# EAGLE board amyboardr4 (EAGLE 9.6.2)

Size 106.1 x 47.49 mm. Coordinates in mm from the lower left corner, seen from the top.
Outline: 0,0 106.1,0 106.1,47.49 0.25,47.49 0,0
Copper layers (1*16): Top 0.035mm / dielectric 1.5mm / Bottom 0.035mm
Design rules "default *": minimum track width 6mil, minimum drill 0.35mm, track to track 6mil, track to pad 6mil, pad to pad 6mil, via to via 6mil, smd to smd 6mil, copper to edge 10mil, drill to drill 6mil, minimum pad ring 10mil, minimum via ring 8mil, stop-mask expansion 4mil, vias tented up to drill 0mil, thermal gap 10mil
Net classes: 0 default: width 0.203 mm

## Footprints (pad centres in the part's own frame; a part is rotated, then mirrored left to right if it is on the bottom)
SW_218-4LPSTR = smd 1.27 x 0.76: 1 -3.81,1.905; 2 -3.81,0.635; 3 -3.81,-0.635; 4 -3.81,-1.905; 5 3.81,-1.905; 6 3.81,-0.635; 7 3.81,0.635; 8 3.81,1.905
2*4*3.5MM = smd 1.15 x 1.3: 1 -1.675,0; 2 1.675,0 | smd 0.9 x 1.2: 3 2.3,1.55; 4 -2.3,1.55
C0603 = smd 0.889 x 0.889: 1 0,0.762; 2 0,-0.762
PANASONIC_C = smd 2.6 x 1.4: + 2.05,0; - -2.05,0
0805-NO@1 = smd 1.24 x 1.5: 1 -0.95,0; 2 0.95,0
0603 = smd 0.889 x 0.889: 1 -0.762,0; 2 0.762,0
DISCRETE_C0603 = smd 0.889 x 0.889: 1 -0.762,0; 2 0.762,0
NV-PJ3410_SOCKET = drill 0.33 pad 1.93 long: GND 3.69,0; LEFT/TIP 0,-4.49; RIGHT/RING 0,3.459; SWITCH -3.674,0
DO-214AC = smd 1.8 x 2.4: A 2.025,0; C -2.025,0
SOT363 = smd 0.5 x 0.5: 1 -0.75,-0.9; 3 0.75,-0.9; 4 0.75,0.9; 6 -0.75,0.9 | smd 0.4 x 0.5: 2 0,-0.9; 5 0,0.9
SOD323 = smd 1 x 0.8: + -1.2,0; - 1.2,0
R0805 = smd 1.3 x 1.5: 1 -0.95,0; 2 0.95,0
2X6 = drill 1.016 pad 1.88: 1 0,0; 2 0,2.54; 3 2.54,0; 4 2.54,2.54; 5 5.08,0; 6 5.08,2.54; 7 7.62,0; 8 7.62,2.54; 9 10.16,0; 10 10.16,2.54; 11 12.7,0; 12 12.7,2.54
HW4-SMD-2.0-90D = smd 1.01 x 2.74: 1 -3,-0.1; 2 -1,-0.1; 3 1,-0.1; 4 3,-0.1 | smd 1.5 x 3: SS1 -5.4,7.4; SS2 5.4,7.4
AMPHENOL_52601-G10-8LF = smd 1.27 x 3.18: 01 -5.08,-2.73; 02 -5.08,2.73; 03 -2.54,-2.73; 04 -2.54,2.73; 05 0,-2.73; 06 0,2.73; 07 2.54,-2.73; 08 2.54,2.73; 09 5.08,-2.73; 10 5.08,2.73
CR54 = smd 4.2 x 1.4: P$1 0,1.85; P$2 0,-1.85
PW20_TEX = smd 1.473 x 0.356: 1 -2.921,2.925; 2 -2.921,2.275; 3 -2.921,1.625; 4 -2.921,0.975; 5 -2.921,0.325; 6 -2.921,-0.325; 7 -2.921,-0.975; 8 -2.921,-1.625; 9 -2.921,-2.275; 10 -2.921,-2.925; 11 2.921,-2.925; 12 2.921,-2.275; 13 2.921,-1.625; 14 2.921,-0.975; 15 2.921,-0.325; 16 2.921,0.325; 17 2.921,0.975; 18 2.921,1.625; 19 2.921,2.275; 20 2.921,2.925
SOT23 = smd 1.016 x 1.143: 1 -0.95,-1.016; 2 0.95,-1.016; 3 0,1.016
R0805' = smd 1.1 x 1.4: 1 -1,0; 2 1,0
DISCRETE_R0603 = smd 0.889 x 0.889: 1 -0.762,0; 2 0.762,0
R0603 = smd 0.889 x 0.889: 1 -0.762,0; 2 0.762,0
9P-SMD-W/-RING = smd 1.524 x 0.762: 1 0,4.4; 2 0,3.3; 3 0,2.2; 4 0,1.1; 5 0,0; 6 0,-1.1; 7 0,-2.2; 8 0,-3.3; 9 0,-4.4 | smd 1.524 x 1.016: G1 0.6,-5.746 | smd 2.032 x 1.524: G2 10.373,-5.4; G3 10.373,10 | smd 1.524 x 1.524: G4 0.392,9.181 | hole 0.889: 10.9,-2.6; 10.9,5.4
QFP50P900X900X160-48N = smd 1.56 x 0.28: 1 -4.18,2.75; 2 -4.18,2.25; 3 -4.18,1.75; 4 -4.18,1.25; 5 -4.18,0.75; 6 -4.18,0.25; 7 -4.18,-0.25; 8 -4.18,-0.75; 9 -4.18,-1.25; 10 -4.18,-1.75; 11 -4.18,-2.25; 12 -4.18,-2.75; 25 4.18,-2.75; 26 4.18,-2.25; 27 4.18,-1.75; 28 4.18,-1.25; 29 4.18,-0.75; 30 4.18,-0.25; 31 4.18,0.25; 32 4.18,0.75; 33 4.18,1.25; 34 4.18,1.75; 35 4.18,2.25; 36 4.18,2.75 | smd 0.28 x 1.56: 13 -2.75,-4.18; 14 -2.25,-4.18; 15 -1.75,-4.18; 16 -1.25,-4.18; 17 -0.75,-4.18; 18 -0.25,-4.18; 19 0.25,-4.18; 20 0.75,-4.18; 21 1.25,-4.18; 22 1.75,-4.18; 23 2.25,-4.18; 24 2.75,-4.18; 37 2.75,4.18; 38 2.25,4.18; 39 1.75,4.18; 40 1.25,4.18; 41 0.75,4.18; 42 0.25,4.18; 43 -0.25,4.18; 44 -0.75,4.18; 45 -1.25,4.18; 46 -1.75,4.18; 47 -2.25,4.18; 48 -2.75,4.18
ESP32-­S2-­SOLO = smd 1.5 x 0.9: 1 -8.75,5.26; 2 -8.75,3.99; 3 -8.75,2.72; 4 -8.75,1.45; 5 -8.75,0.18; 6 -8.75,-1.09; 7 -8.75,-2.36; 8 -8.75,-3.63; 9 -8.75,-4.9; 10 -8.75,-6.17; 11 -8.75,-7.44; 12 -8.75,-8.71; 13 -8.75,-9.98; 14 -8.75,-11.25; 27 8.75,-11.25; 28 8.75,-9.98; 29 8.75,-8.71; 30 8.75,-7.44; 31 8.75,-6.17; 32 8.75,-4.9; 33 8.75,-3.63; 34 8.75,-2.36; 35 8.75,-1.09; 36 8.75,0.18; 37 8.75,1.45; 38 8.75,2.72; 39 8.75,3.99; 40 8.75,5.26 | smd 0.9 x 1.5: 15 -6.985,-12.5; 16 -5.715,-12.5; 17 -4.445,-12.5; 18 -3.175,-12.5; 19 -1.905,-12.5; 20 -0.635,-12.5; 21 0.635,-12.5; 22 1.905,-12.5; 23 3.175,-12.5; 24 4.445,-12.5; 25 5.715,-12.5; 26 6.985,-12.5 | smd 3.7 x 3.7: 41 -1.5,-2.46
SOT23-5 = smd 0.69 x 1.2: 1 -0.95,-1.3; 2 0,-1.3; 3 0.95,-1.3; 4 0.95,1.3; 5 -0.95,1.3
SOIC127P600X175-14N = smd 1.97 x 0.6: 1 -2.475,3.81; 2 -2.475,2.54; 3 -2.475,1.27; 4 -2.475,0; 5 -2.475,-1.27; 6 -2.475,-2.54; 7 -2.475,-3.81; 8 2.475,-3.81; 9 2.475,-2.54; 10 2.475,-1.27; 11 2.475,0; 12 2.475,1.27; 13 2.475,2.54; 14 2.475,3.81
SOT-23-6 = smd 1 x 0.6: 1 -1.2,0.95; 2 -1.2,0; 3 -1.2,-0.95; 4 1.2,-0.95; 5 1.2,0; 6 1.2,0.95
SOP-6-2.54MM = smd 1.6 x 1.8: 1 -4.5,2.54; 2 -4.5,0; 3 -4.5,-2.54; 4 4.5,-2.54; 5 4.5,0; 6 4.5,2.54
SOIC-10 = smd 0.6 x 2.2: 1 -2.54,-2.6; 2 -1.27,-2.6; 3 0,-2.6; 4 1.27,-2.6; 5 2.54,-2.6; 6 2.54,2.6; 7 1.27,2.6; 8 0,2.6; 9 -1.27,2.6; 10 -2.54,2.6
USB-C-16P-5 = smd 0.3 x 1: A5 -1.25,-0.34; A6 -0.25,-0.34; A7 0.25,-0.34; A8 1.25,-0.34; B5 1.75,-0.34; B6 0.75,-0.34; B7 -0.75,-0.34; B8 -1.75,-0.34 | smd 0.6 x 1: GND -3.225,-0.34; GND2 3.225,-0.34; VBUS1 -2.45,-0.34; VBUS2 2.45,-0.34 | smd 1 x 2.1: SHLD1 -4.32,-0.915; SHLD2 4.32,-0.915 | smd 1 x 2.1 bottom: SHLD3 -4.32,-0.915; SHLD4 4.32,-0.915 | smd 1 x 1.6: SHLD5 -4.32,-5.095; SHLD8 4.32,-5.095 | smd 1 x 1.6 bottom: SHLD6 -4.32,-5.095; SHLD7 4.32,-5.095 | hole 0.65: -2.89,-1.445; 2.89,-1.445
XTAL_ABM10W-22.5792MHZ-8-K1Z-T3 = smd 0.85 x 1.2: 1 -0.6,0.812; 2 -0.6,-0.812; 3 0.6,-0.812; 4 0.6,0.812

## Placement (x,y rotation side)
1-10VPP  218-4LPSTR  [SW_218-4LPSTR]  18.29,15.24 0 bottom
BOOT  TS24CA  [2*4*3.5MM]  47.75,45.21 0 top
C1  0.1uF  [C0603]  12.45,19.81 0 top
C2  10uF  [PANASONIC_C]  33.78,16.51 0 top
C3  10uF  [PANASONIC_C]  26.67,16.51 0 top
C4  0.1uF  [C0603]  25.91,36.07 90 top
C5  0.1uF  [0805-NO@1]  25.15,23.88 90 top
C6  68nF  [0805-NO@1]  44.96,11.43 0 top
C7  10uF  [PANASONIC_C]  4.57,8.64 0 top
C8  0.1uF  [0805-NO@1]  68.58,9.4 0 top
C9  1nF  [C0603]  33.02,25.15 90 top
C10  1nF  [C0603]  36.83,31.24 0 top
C11  0.1uF  [0805-NO@1]  3.56,26.42 90 top
C12  10uF  [PANASONIC_C]  92.2,15.75 0 top
C13  0.1uF  [0805-NO@1]  89.66,28.7 0 top
C14  10uF  [PANASONIC_C]  76.71,15.75 0 top
C15  0.1uF  [0805-NO@1]  8.89,20.57 90 top
C16  10uF  [PANASONIC_C]  69.09,15.75 0 top
C17  4.7nF  [0805-NO@1]  46.74,14.22 0 top
C18  10pF  [C0603]  3.81,38.1 90 top
C19  10pF  [C0603]  92.71,20.83 0 top
C20  100nF  [C0603]  6.6,33.78 0 top
C21  20pF  [C0603]  3.3,33.78 0 top
C22  1uF  [PANASONIC_C]  6.1,30.73 0 top
C23  0.1uF  [0805-NO@1]  4.32,25.15 0 top
C24  0.1uF  [0805-NO@1]  4.32,22.61 0 top
C26  0.1uF  [0805-NO@1]  4.32,20.07 0 top
C27  22uF  [C0603]  33.02,36.83 0 top
C28  100nF  [C0603]  29.72,36.83 0 top
C29  22pF  [C0603]  36.32,36.83 0 top
C30  22uF  [C0603]  3.3,42.67 0 top
C31  22uF  [C0603]  9.91,33.78 0 top
C32  4.7uF/16V  [0603]  35.81,27.43 0 top
C33  10uF  [0603]  35.81,32.51 0 top
C34  10uF  [DISCRETE_C0603]  28.96,21.08 0 top
C35  NC  [0603]  40.13,32.51 0 top
C70  0.1uF  [DISCRETE_C0603]  32.77,21.08 0 top
C85  10uF  [DISCRETE_C0603]  100.58,22.1 90 top
C86  0.1uF  [0805-NO@1]  99.82,36.83 0 top
C87  0.1uF  [0805-NO@1]  99.82,42.42 0 top
C88  0.1uF  [0805-NO@1]  28.7,14.22 0 top
C89  0.1uF  [0805-NO@1]  9.14,14.48 90 top
C90  2.2uF  [0805-NO@1]  84.84,9.4 0 top
C91  2.2uF  [0805-NO@1]  100.08,34.29 0 top
C92  10uF  [PANASONIC_C]  84.07,15.75 0 top
C93  10uF  [PANASONIC_C]  65.28,22.1 0 top
C94  10uF  [PANASONIC_C]  18.8,21.59 0 top
C95  10uF  [PANASONIC_C]  57.91,22.1 0 top
C96  2.2nF  [0805-NO@1]  99.82,39.37 0 top
C97  2.2nF  [0805-NO@1]  5.08,2.54 180 top
C98  0.1uF  [DISCRETE_C0603]  104.65,19.81 0 top
C99  0.1uF  [DISCRETE_C0603]  74.93,20.57 0 top
C100  10uF  [DISCRETE_C0603]  12.45,14.22 90 top
C103  0.1uF  [DISCRETE_C0603]  12.45,41.4 0 top
C106  4.7uF/16V  [0603]  95.25,30.48 0 top
C107  10uF  [0603]  5.08,34.8 0 top
C108  NC  [0603]  100.08,30.48 90 top
C112  10uF  [DISCRETE_C0603]  60.96,31.24 270 top
CV_IN1  NV-PJ3410_STEREO  [NV-PJ3410_SOCKET]  42.16,40.13 270 bottom
CV_IN2  NV-PJ3410_STEREO  [NV-PJ3410_SOCKET]  52.83,40.13 270 bottom
CV_OUT1  NV-PJ3410_STEREO  [NV-PJ3410_SOCKET]  42.16,30.23 270 bottom
CV_OUT2  NV-PJ3410_STEREO  [NV-PJ3410_SOCKET]  52.83,30.23 270 bottom
D1  SS54  [DO-214AC]  16.26,8.38 0 top
D2  SS54  [DO-214AC]  16.26,0.76 0 top
D8  SS54  [DO-214AC]  39.88,20.07 0 top
D9  SS54  [DO-214AC]  15.24,41.4 0 top
D10  SS54  [DO-214AC]  15.24,33.78 0 top
D12  SMF05C  [SOT363]  48.01,21.84 180 top
D13  1N4148WS  [SOD323]  13.46,38.61 0 top
D14  SS54  [DO-214AC]  11.68,8.13 90 top
FB3  100Mhz@120R  [R0805]  33.53,18.8 0 top
HOST  2X6 FEMALE  [2X6]  85.85,5.84 180 top
I2C_CONTROL  [HW4-SMD-2.0-90D]  22.35,9.65 180 top
I2C_HOST  [HW4-SMD-2.0-90D]  3.56,8.13 90 bottom
J1  52601-G10-8LF  [AMPHENOL_52601-G10-8LF]  50.8,4.83 0 top
L3  3.3µH/±30%/3.4A  [CR54]  32.77,20.07 0 top
LINE_IN  NV-PJ3410_STEREO  [NV-PJ3410_SOCKET]  10.16,40.13 270 bottom
LINE_OUT  NV-PJ3410_STEREO  [NV-PJ3410_SOCKET]  10.16,30.23 270 bottom
MIDI_IN  NV-PJ3410_STEREO  [NV-PJ3410_SOCKET]  31.5,40.13 270 bottom
MIDI_OUT  NV-PJ3410_STEREO  [NV-PJ3410_SOCKET]  31.5,30.23 270 bottom
PCM5101  U11  [PW20_TEX]  66.04,4.32 0 top
Q2  S8050  [SOT23]  29.46,25.15 0 top
Q5  S8050  [SOT23]  37.85,23.11 0 top
R1  51K  [R0805']  33.02,36.83 0 top
R2  51K  [R0805']  29.21,18.8 0 top
R3  150  [DISCRETE_R0603]  24.89,19.05 90 top
R4  680  [R0805']  104.39,30.73 0 top
R5  10K  [R0805']  32.77,26.92 0 top
R6  15K  [R0805']  42.93,29.72 0 top
R7  30K  [R0805']  90.42,24.38 0 top
R8  30K  [R0805']  11.68,29.21 0 top
R9  10K  [R0603]  93.73,25.4 90 top
R10  30K  [R0805']  4.83,15.75 0 top
R11  30K  [R0805']  4.83,9.91 0 top
R14  100K  [DISCRETE_R0603]  38.61,26.16 0 top
R15  NC  [DISCRETE_R0603]  42.42,26.16 0 top
R16  NC  [DISCRETE_R0603]  30.73,33.53 0 top
R17  0R  [DISCRETE_R0603]  34.54,33.53 0 top
R18  228K  [DISCRETE_R0603]  38.35,33.53 0 top
R19  12K  [DISCRETE_R0603]  42.16,33.53 0 top
R20  10K  [R0805']  11.18,23.37 0 top
R21  15K  [R0805']  4.32,15.49 0 top
R22  30K  [R0805']  4.83,4.06 0 top
R25  22K  [R0805']  39.62,44.2 0 top
R26  22K  [R0805']  39.62,38.35 0 top
R27  51K  [R0805']  39.62,32.51 0 top
R28  51K  [R0805']  39.62,26.67 0 top
R29  22K  [R0805']  39.62,20.83 0 top
R30  22K  [R0805']  39.62,14.99 0 top
R55  10K  [R0603]  28.96,28.7 0 top
R70  10K  [R0603]  33.78,11.68 0 top
R71  5.1K  [DISCRETE_R0603]  37.59,36.32 0 top
R72  5.1K  [DISCRETE_R0603]  94.23,32.77 0 top
R78  470  [R0805']  4.57,16.26 90 top
R79  470  [R0805']  31.5,30.23 0 top
R80  0R  [DISCRETE_R0603]  89.66,20.83 0 top
R82  10K  [DISCRETE_R0603]  30.73,11.18 270 top
R83  10K  [R0603]  105.16,23.37 0 top
R84  51R  [R0603]  21.08,39.88 90 top
R85  51R  [R0603]  29.21,36.58 90 top
R86  NC  [DISCRETE_R0603]  37.85,30.99 180 top
R87  NC  [R0603]  49.28,18.29 90 top
R88  220R  [R0603]  78.49,9.65 180 top
R89  33R  [R0603]  15.24,34.8 0 top
R90  10R  [R0603]  21.59,30.48 0 top
R91  470R  [R0603]  10.41,30.48 0 top
R99  10K  [DISCRETE_R0603]  35.05,32.51 270 top
R100  10K  [DISCRETE_R0603]  41.4,36.58 270 top
R101  10K  [DISCRETE_R0603]  39.12,39.62 180 top
R102  10K  [DISCRETE_R0603]  100.58,18.8 0 top
RST  TS24CA  [2*4*3.5MM]  61.98,45.25 0 top
SD1  [9P-SMD-W/-RING]  95.25,13.97 270 top
SPDIF_IN  NV-PJ3410_STEREO  [NV-PJ3410_SOCKET]  20.83,30.23 270 bottom
SPDIF_OUT  NV-PJ3410_STEREO  [NV-PJ3410_SOCKET]  20.83,40.13 270 bottom
U1  PCM9211PT  [QFP50P900X900X160-48N]  91.19,40.89 0 top
U2  ESP32­S2­SOLO  [ESP32-­S2-­SOLO]  74.93,37.08 0 top
U3  SPX3819  [SOT23-5]  36.83,21.84 0 top
U4  TL074CD  [SOIC127P600X175-14N]  54.86,14.73 0 top
U6  HX3608  [SOT-23-6]  37.85,10.67 0 top
U15  H11L1SR2M  [SOP-6-2.54MM]  101.85,12.95 0 top
U16  SPX3819  [SOT23-5]  100.08,26.42 0 top
U$7  GP8413  [SOIC-10]  48.26,26.16 0 top
USB  [USB-C-16P-5]  34.8,6.1 0 top
Y1  22.5792MHZ  [XTAL_ABM10W-22.5792MHZ-8-K1Z-T3]  53.34,30.48 90 top

## Library data of the parts
1-10VPP = 218-4LPSTR; AVAILABILITY: In Stock; CHECK_PRICES: https://www.snapeda.com/parts/218-4LPSTR/CTS+Components/view-part/?ref=eda; DESCRIPTION: Dip Switch SPST 4 Position Surface Mount Slide (Standard) Actuator 25mA 24VDC; MF: CTS Electrocomponents; MP: 218-4LPSTR; PACKAGE: None; PRICE: None; SNAPEDA_LINK: https://www.snapeda.com/parts/218-4LPSTR/CTS+Components/view-part/?ref=snap
BOOT RST U15 = sale
C1 C4 C9 C10 C18-C21 C27-C31 = Discrete-new
C2 C3 C5-C8 C11-C17 C22-C24 C26 C86-C97 D12 = microbuilder
C32 C33 C35 C106-C108 D13 Q2 Q5 R9 R55 R70 R83-R85 R87-R91 = Discrete
C34 C70 C85 C98-C100 C103 C112 R3 R14-R19 R71 R72 R80 R82 R86 R99-R102 = A9G
CV_IN1 CV_IN2 CV_OUT1 CV_OUT2 LINE_IN LINE_OUT MIDI_IN MIDI_OUT SPDIF_IN SPDIF_OUT = PJ3410_sockets
D1 D2 D8-D10 D14 = diode
FB3 = rcl
HOST = SparkFun-Connectors; PROD_ID: CONN-12423
I2C_CONTROL I2C_HOST = Connector-new
J1 = 52601-G10-8LF; AVAILABILITY: In Stock; CHECK_PRICES: https://www.snapeda.com/parts/52601-G10-8LF/Amphenol+FCI/view-part/?ref=eda; DESCRIPTION: Conn; Rect; Header; SMT; Shroud; 2.54 mm; 2-Row; 10 Pos; Gold (30) Plate;Quickie | Amphenol FCI (Amphenol CS) 52601-G10-8LF; MF: Amphenol ICC; MP: 52601-G10-8LF; PACKAGE: None; PRICE: None; SNAPEDA_LINK: https://www.snapeda.com/parts/52601-G10-8LF/Amphenol+FCI/view-part/?ref=snap
L3 = SparkFun-Coils; PROD_ID: NDUC-11157
PCM5101 = pcm5101apw; COPYRIGHT: Copyright (C) 2022 Ultra Librarian. All rights reserved.; DIGI-KEY_PART_NUMBER_1: PCM5101APW-ND; MANUFACTURER_PART_NUMBER: PCM5101APW; MFR_NAME: Texas Instruments
R1 R2 R4-R8 R10 R11 R20-R22 R25-R30 R78 R79 = adafruit
SD1 = Connector
U1 = PCM9211PT; AVAILABILITY: In Stock; CHECK_PRICES: https://www.snapeda.com/parts/PCM9211PT/Texas+Instruments/view-part/?ref=eda; DESCRIPTION: 216kHz Digital Audio Interface Transceiver (DIX) with Stereo ADC and Routing; MF: Texas Instruments; MP: PCM9211PT; PACKAGE: LQFP-48 Texas Instruments; PRICE: None; SNAPEDA_LINK: https://www.snapeda.com/parts/PCM9211PT/Texas+Instruments/view-part/?ref=snap
U2 U6 = self
U3 U16 = IC
U4 = TL074CD; AVAILABILITY: In Stock; CHECK_PRICES: https://www.snapeda.com/parts/TL074CD/Texas+Instruments/view-part/?ref=eda; DESCRIPTION: Quad, 30-V, 3-MHz, high slew rate (13-V/µs), In to V+, JFET-input op amp; MF: Texas Instruments; MP: TL074CD; PACKAGE: SOIC-14 Texas Instruments; PRICE: None; SNAPEDA_LINK: https://www.snapeda.com/parts/TL074CD/Texas+Instruments/view-part/?ref=snap
U$7 = FL5160MX; AVAILABILITY: In Stock; CHECK_PRICES: https://www.snapeda.com/parts/FL5160MX/Onsemi/view-part/?ref=eda; DESCRIPTION: Optocoupler Drive 1-CH 5.5V 10-Pin SOIC N T/R; MF: onsemi; MP: FL5160MX; PACKAGE: None; PRICE: None; SNAPEDA_LINK: https://www.snapeda.com/parts/FL5160MX/Onsemi/view-part/?ref=snap
USB = USBC
Y1 = ABM10W-22.5792MHZ-8-K1Z-T3; AVAILABILITY: In Stock; CHECK_PRICES: https://www.snapeda.com/parts/ABM10W-22.5792MHZ-8-K1Z-T3/Abracon/view-part/?ref=eda; DESCRIPTION: IoT OPTIMIZED LOW PROFILE QUARTZ CRYSTAL; MF: Abracon; MP: ABM10W-22.5792MHZ-8-K1Z-T3; PACKAGE: SMD-4 Abracon; PRICE: None; SNAPEDA_LINK: https://www.snapeda.com/parts/ABM10W-22.5792MHZ-8-K1Z-T3/Abracon/view-part/?ref=snap

## Nets
3.3V: C103.2 R89.1 R91.1 U15.6
3V3_IN: D1.A I2C_CONTROL.3
5V: C13.1 C14.+ C33.1 HOST.12 U1.46 U3.5
5V_IN: C34.2 C70.2 C85.2 D14.A FB3.2
12V: C27.1 C28.1 C29.1 D8.C R17.2 R18.2
12V_IN: D2.A J1.09 J1.10
+3V3: C5.1 C11.1 C12.+ C15.1 C16.+ C87.2 C88.2 C89.2 C93.+ C94.+ C95.+ C99.1 C100.1 C107.1 C112.2 D12.4 HOST.2 HOST.5 I2C_HOST.3 PCM5101.1 PCM5101.8 PCM5101.17 PCM5101.20 R5.1 R9.2 R20.1 R82.2 R83.2 R86.2 R87.1 R99.2 R100.2 R101.2 R102.2 SD1.4 U1.22 U1.34 U1.36 U1.42 U2.2 U16.5
+12V: C21.1 C26.1 U4.4 U$7.5
-12V: C20.2 C21.2 C31.2 D10.A U4.11
ADC0: U2.8
ADC1: C10.1 R5.2 R6.1 R8.2 U2.9
ADC2: C9.1 R7.2 R20.2 R21.1
AGND: C7.- C8.2 C11.2 C12.- C13.2 C14.- C87.1 C89.1 C91.2 C94.- C95.- C96.2 C97.2 LINE_IN.GND LINE_OUT.GND PCM5101.3 PCM5101.9 R25.2 R26.2 R29.2 R30.2 R80.1 U1.41 U1.45
AMY_FOLLOWER_SCL: I2C_CONTROL.1 U2.5
AMY_FOLLOWER_SDA: I2C_CONTROL.2 U2.4
AMYIN: U1.17 U2.17
AMYOUT: PCM5101.14 U1.10 U2.6
BCLK: PCM5101.13 U1.8 U1.19 U2.12
CV_OUT1: CV_OUT1.LEFT/TIP R22.2 U4.1
CV_OUT2: CV_OUT2.LEFT/TIP R10.2 R11.2 U4.7
DTR: HOST.11 Q5.2 R70.2
ENABLE: R14.1 U6.4
GND: BOOT.1 BOOT.3 BOOT.4 C5.2 C9.2 C10.2 C15.2 C16.- C17.2 C18.2 C19.2 C20.1 C22.- C23.2 C24.2 C26.2 C27.2 C28.2 C31.1 C32.2 C33.2 C34.1 C35.2 C70.1 C85.1 C86.2 C88.1 C92.- C93.- C98.2 C99.2 C100.2 C103.1 C106.2 C107.2 C108.2 C112.1 CV_IN1.GND CV_OUT1.GND CV_OUT2.GND D9.C D12.2 HOST.1 I2C_CONTROL.4 I2C_CONTROL.SS1 I2C_CONTROL.SS2 I2C_HOST.4 I2C_HOST.SS1 I2C_HOST.SS2 J1.01 J1.02 J1.03 J1.04 J1.05 J1.06 J1.07 J1.08 MIDI_IN.GND MIDI_OUT.GND PCM5101.10 PCM5101.11 PCM5101.12 PCM5101.16 PCM5101.19 R4.1 R6.2 R15.1 R19.1 R21.2 R71.1 R72.1 R80.2 RST.1 RST.3 RST.4 SD1.6 SD1.G1 SD1.G2 SD1.G3 SD1.G4 SPDIF_IN.GND SPDIF_OUT.GND U1.21 U1.23 U1.26 U1.27 U1.38 U2.1 U2.40 U2.41 U3.2 U6.2 U15.5 U16.2 U$7.3 U$7.4 U$7.6 U$7.9 USB.GND USB.GND2 Y1.2 Y1.4
I2C_SCL: I2C_HOST.1 U1.25 U2.11 U$7.1
I2C_SDA: I2C_HOST.2 U1.24 U2.10 U$7.2
IO0: BOOT.2 Q5.3 R9.1 U2.27
IO1: U2.39
IO19: R84.2 U2.13
IO20: R85.2 U2.14
IO40: U2.33
IO41: U2.34
IO42: U2.35
IO45: R87.2 U2.26
IO46: U2.16
IO47: U2.24
IO48: U2.25
LIN: LINE_IN.LEFT/TIP R2.2
LINX: C2.+ U1.47
LOUT: LINE_OUT.LEFT/TIP R27.2 U4.8
LOUT_2V: C97.1 R79.1 U4.10
LRC: PCM5101.15 U1.9 U1.18 U2.38
MCLK: U1.7 U1.20 U2.7 U2.15
MIDI_IN: R91.2 U2.23 U15.4
MIDI_OUT: R90.1 U2.22
N$1: C1.2 U1.37
N$2: C4.2 R3.2
N$3: C4.1 U1.15
N$4: 1-10VPP.1 C2.- R2.1
N$5: 1-10VPP.2 C3.- R1.1
N$6: C7.+ C8.1 U1.44
N$7: C6.1 C17.1 U1.43
N$8: C6.2 R4.2
N$9: SPDIF_OUT.RIGHT/RING
N$10: SPDIF_IN.RIGHT/RING
N$11: CV_OUT1.RIGHT/RING
N$12: CV_OUT2.RIGHT/RING
N$13: CV_IN1.RIGHT/RING
N$14: CV_IN2.RIGHT/RING
N$15: C35.1 U3.4
N$17: CV_IN1.LEFT/TIP R8.1
N$18: C24.1 U4.3 U$7.8
N$19: CV_IN2.LEFT/TIP R7.1
N$20: C23.1 U4.5 U$7.7
N$21: C30.1 D8.A L3.P$2 U6.1
N$22: C22.+ U$7.10
N$26: C29.2 R18.1 R19.2 U6.3
N$27: R15.2 U6.6
N$28: R16.1 R17.1 U6.5
N$29: C30.2 D9.A D10.C
N$31: R10.1 R11.1 U4.6
N$33: R22.1 U4.2
N$34: Q2.1 R70.1
N$35: 1-10VPP.5 R26.1
N$36: 1-10VPP.6 R25.1
N$37: Q5.1 R55.1
N$38: R72.2 USB.A5
N$39: R71.2 USB.B5
N$40: 1-10VPP.8 R29.1
N$41: 1-10VPP.7 R30.1
N$42: FB3.1 USB.VBUS1 USB.VBUS2
N$44: 1-10VPP.3 R27.1 U4.9
N$45: 1-10VPP.4 R28.1 U4.13
N$48: C86.1 C92.+ PCM5101.18
N$50: PCM5101.7 R78.2
N$51: C90.1 PCM5101.4
N$52: C90.2 PCM5101.2
N$55: D13.+ MIDI_IN.LEFT/TIP U15.2
N$56: MIDI_IN.RIGHT/RING R88.2
N$57: D13.- R88.1 U15.1
N$58: MIDI_OUT.LEFT/TIP R90.2
N$59: MIDI_OUT.RIGHT/RING R89.2
N$60: C108.1 U16.4
N$75: R100.1 SD1.1
N$77: R102.1 SD1.8
OUTL: PCM5101.6 R79.2
PWM0: U2.31
PWM1: U2.32
RESET: C98.1 Q2.3 R83.1 RST.2 U2.3
RIN: LINE_IN.RIGHT/RING R1.2
RINX: C3.+ U1.48
ROUT: LINE_OUT.RIGHT/RING R28.2 U4.14
ROUT_2V: C96.1 R78.1 U4.12
RTS: HOST.3 Q2.2 R55.2
RXD/IO44: HOST.7 U2.36
SPDIFIN_SIGNAL: C1.1 SPDIF_IN.LEFT/TIP
SPDIFOUT_SIGNAL: R3.1 SPDIF_OUT.LEFT/TIP
SPI0_CS0: D12.1 HOST.4 R101.1 SD1.2 U2.18
SPI0_MISO: D12.6 HOST.8 R99.1 SD1.7 U2.21
SPI0_MOSI: D12.3 HOST.6 R82.1 SD1.3 U2.19
SPI0_SCK: D12.5 HOST.10 R86.1 SD1.5 U2.20
TXD/IO43: HOST.9 U2.37
USB_D+: R85.1 USB.A6 USB.B6
USB_D-: R84.1 USB.A7 USB.B7
VNEG: C91.1 PCM5101.5
VPWR: C32.1 C106.1 D1.C D2.C D14.C L3.P$1 R14.2 R16.2 U3.1 U3.3 U16.1 U16.3
XTI: C19.1 U1.39 Y1.1
XTO: C18.1 U1.40 Y1.3

## Tracks (layer width: path | path; a pad name or v marks a point on that pad's centre or on a via)
3.3V  (3 unrouted)
3V3_IN  (1 unrouted)
5V  (5 unrouted)
5V_IN  (4 unrouted)
12V  (5 unrouted)
12V_IN  (2 unrouted)
+3V3  (40 unrouted)
+12V  (3 unrouted)
-12V  (4 unrouted)
ADC1  (4 unrouted)
ADC2  (3 unrouted)
AGND  (23 unrouted)
AMY_FOLLOWER_SCL  (1 unrouted)
AMY_FOLLOWER_SDA  (1 unrouted)
AMYIN  (1 unrouted)
AMYOUT  (2 unrouted)
BCLK  (3 unrouted)
CV_OUT1  (2 unrouted)
CV_OUT2  (3 unrouted)
DTR  (2 unrouted)
ENABLE  (1 unrouted)
GND  (101 unrouted)
I2C_SCL  (3 unrouted)
I2C_SDA  (3 unrouted)
IO0  (3 unrouted)
IO19  (1 unrouted)
IO20  (1 unrouted)
IO45  (1 unrouted)
LIN  (1 unrouted)
LINX  (1 unrouted)
LOUT  (2 unrouted)
LOUT_2V  (2 unrouted)
LRC  (3 unrouted)
MCLK  (3 unrouted)
MIDI_IN  (2 unrouted)
MIDI_OUT  (1 unrouted)
N$1  (1 unrouted)
N$2  (1 unrouted)
N$3  (1 unrouted)
N$4  (2 unrouted)
N$5  (2 unrouted)
N$6  (2 unrouted)
N$7  (2 unrouted)
N$8  (1 unrouted)
N$15  (1 unrouted)
N$17  (1 unrouted)
N$18  (2 unrouted)
N$19  (1 unrouted)
N$20  (2 unrouted)
N$21  (3 unrouted)
N$22  (1 unrouted)
N$26  (3 unrouted)
N$27  (1 unrouted)
N$28  (2 unrouted)
N$29  (2 unrouted)
N$31  (2 unrouted)
N$33  (1 unrouted)
N$34  (1 unrouted)
N$35  (1 unrouted)
N$36  (1 unrouted)
N$37  (1 unrouted)
N$38  (1 unrouted)
N$39  (1 unrouted)
N$40  (1 unrouted)
N$41  (1 unrouted)
N$42  (2 unrouted)
N$44  (2 unrouted)
N$45  (2 unrouted)
N$48  (2 unrouted)
N$50  (1 unrouted)
N$51  (1 unrouted)
N$52  (1 unrouted)
N$55  (2 unrouted)
N$56  (1 unrouted)
N$57  (2 unrouted)
N$58  (1 unrouted)
N$59  (1 unrouted)
N$60  (1 unrouted)
N$75  (1 unrouted)
N$77  (1 unrouted)
OUTL  (1 unrouted)
RESET  (4 unrouted)
RIN  (1 unrouted)
RINX  (1 unrouted)
ROUT  (2 unrouted)
ROUT_2V  (2 unrouted)
RTS  (2 unrouted)
RXD/IO44  (1 unrouted)
SPDIFIN_SIGNAL  (1 unrouted)
SPDIFOUT_SIGNAL  (1 unrouted)
SPI0_CS0  (4 unrouted)
SPI0_MISO  (4 unrouted)
SPI0_MOSI  (4 unrouted)
SPI0_SCK  (4 unrouted)
TXD/IO43  (1 unrouted)
USB_D+  (2 unrouted)
USB_D-  (2 unrouted)
VNEG  (1 unrouted)
VPWR  (11 unrouted)
XTI  (2 unrouted)
XTO  (2 unrouted)

## Text on the board
Measures: Units: Inches | Units: Inches